# Altium PCB ECEN5730_brd1a_2022-15-01.PcbDoc
Units mil, origin at the board's own origin, x right, y up, seen from the top; angles counter-clockwise.
Board outline 3500 x 2000 mil, 2 copper layers (Top Layer, Bottom Layer), stack 61.756 mil thick; 22 components, 12 nets, 57 pads, 13 vias.
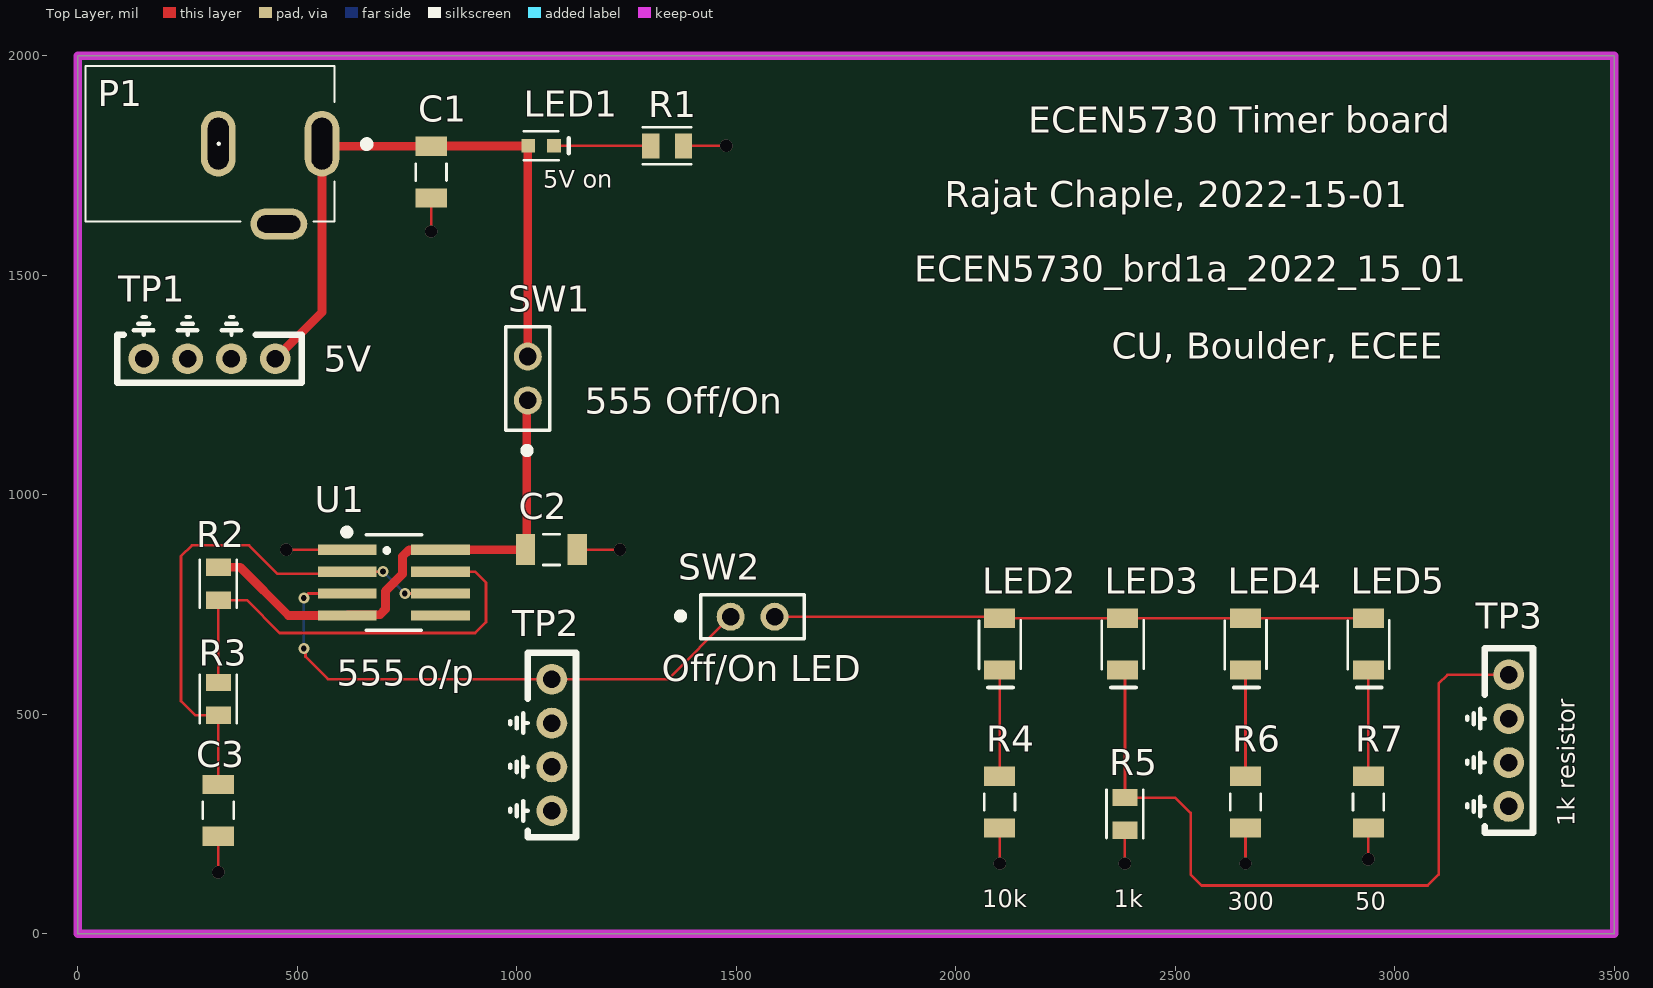
[diagram p0: Top Layer view]
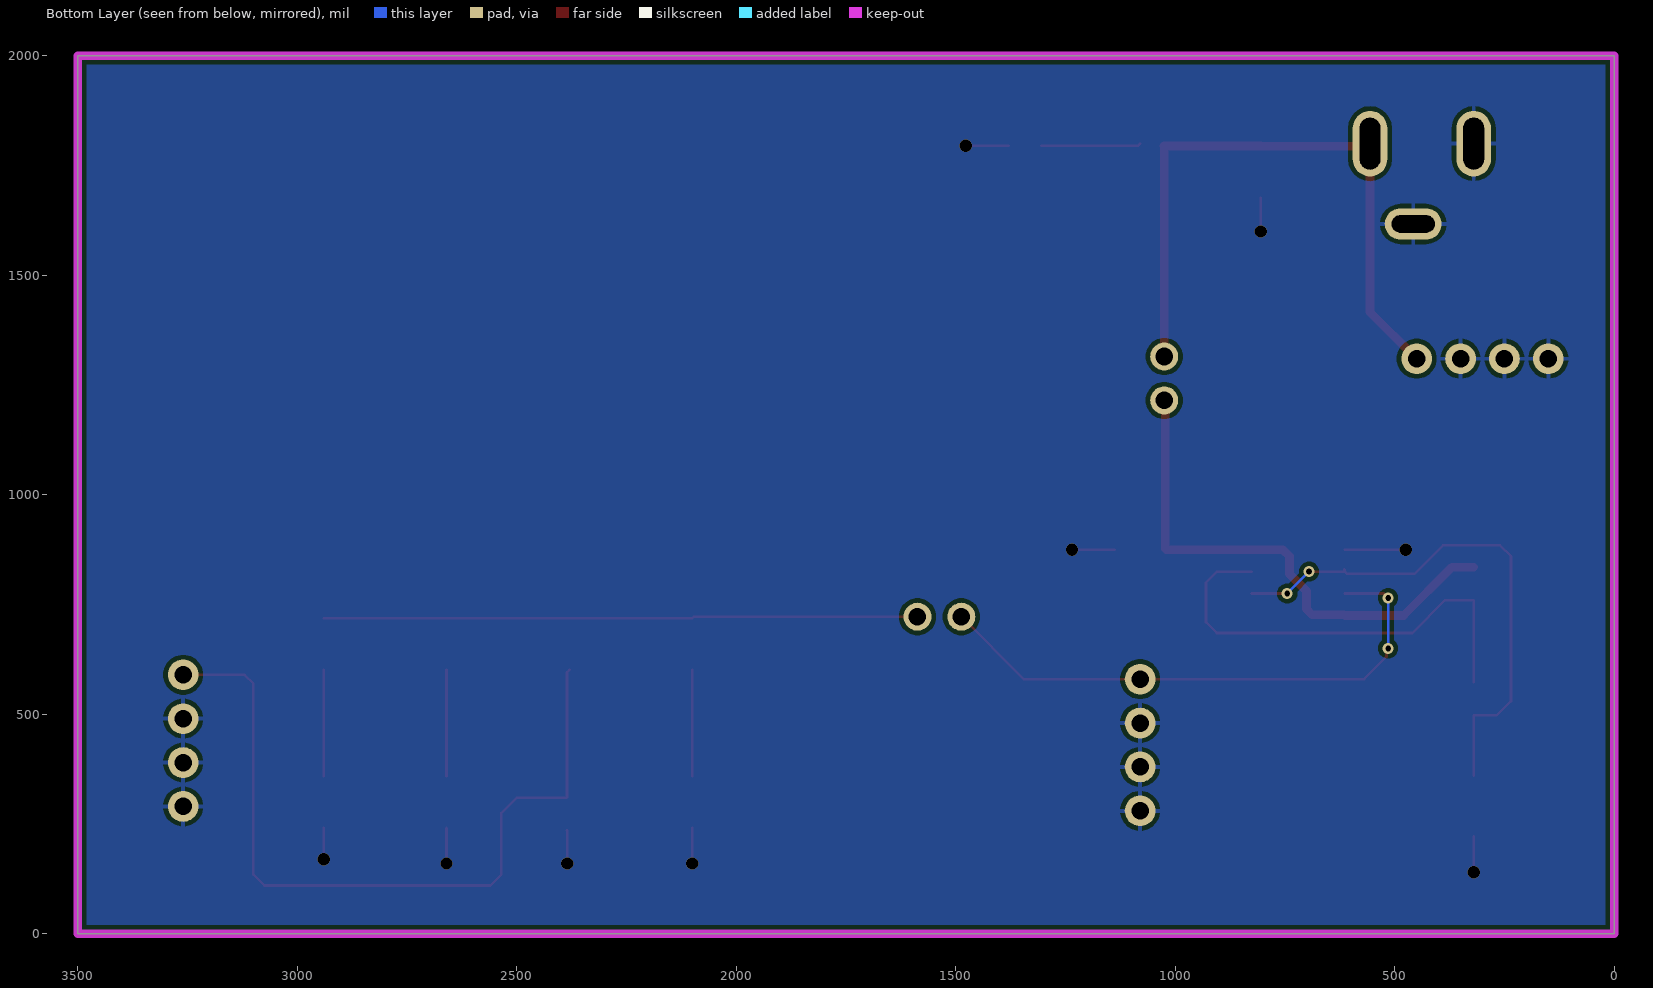
[diagram p1: Bottom Layer view, seen from below]
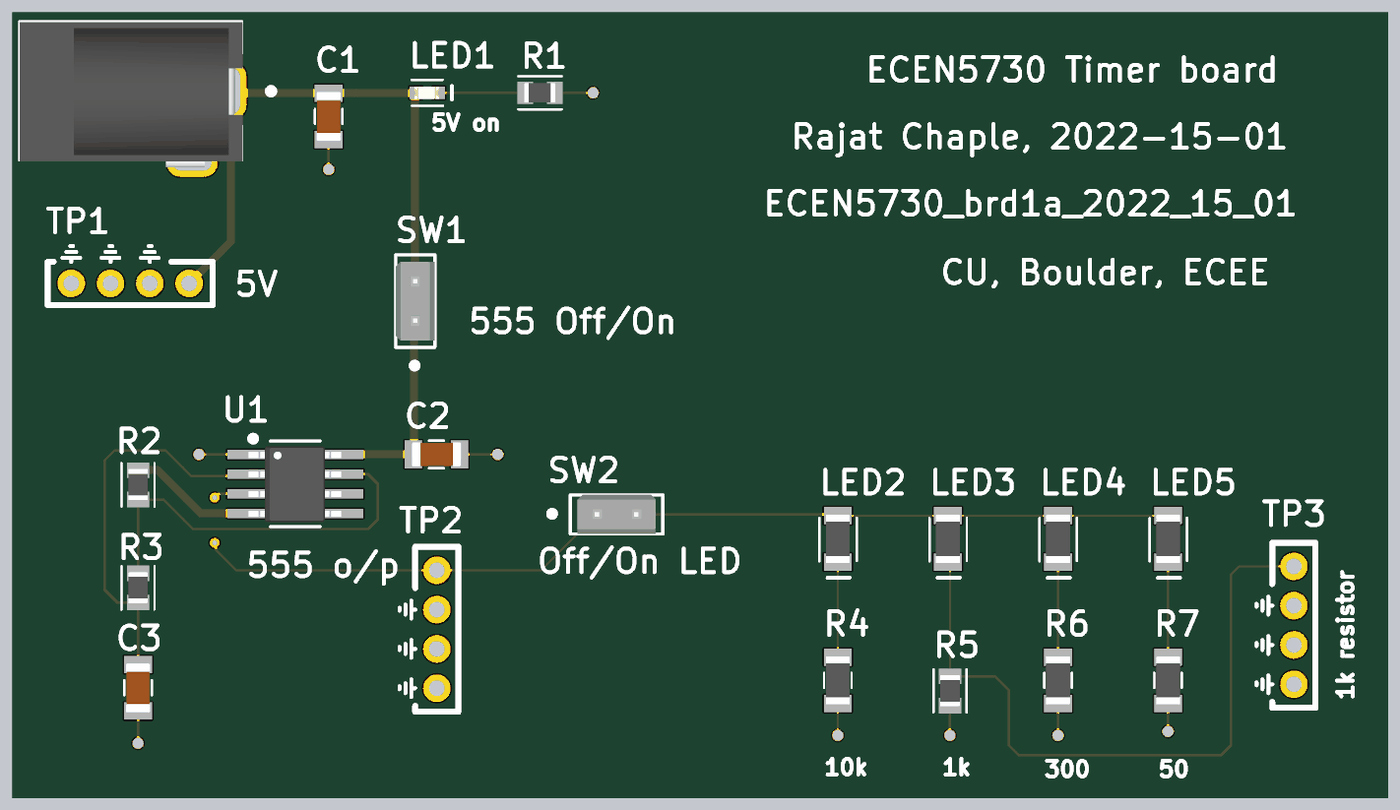
[diagram p2: 3D render of the assembled board from above, using the file's embedded part models]

## Layer stack, top to bottom
Top Solder: solder mask 1, SM-001, Dk 4
Top Layer: signal copper 1.378
Dielectric 1: core 59, Core-043, Dk 4.3
Bottom Layer: signal copper 1.378
Bottom Solder: solder mask 1, SM-001, Dk 4

## Board outline
0,0 3500,0 3500,2000 0,2000

## Design rules (kind name [scope] priority, off if disabled: settings)
BoardOutlineClearance [All] p1: gap=10 ignorepadtopadclearanceinfootprint=FALSE except(0: Arc-SplitContinuation Track-SplitContinuation SMDPad-SplitContinuation THPad-SplitContinuation Via-SplitContinuation Fill-SplitContinuation Poly-SplitContinuation Region-SplitContinuation Text-SplitContinuation)
Clearance [All] p1: gap=10 ignorepadtopadclearanceinfootprint=FALSE except(0: Arc-Hole Track-Hole SMDPad-Hole THPad-Hole Via-Hole Fill-Hole Poly-Hole Region-Hole Text-Hole)
HoleSize [All] p1: absolutevalues=TRUE maxlimit=120 minlimit=1 maxpercent=80.000 minpercent=20.000
PlaneClearance [All] p1: clearance=10
PlaneConnect [All] p1: planeconnectstyle=Direct reliefexpansion=20 reliefentries=4 reliefconductorwidth=10 reliefairgap=10
PolygonConnect [All] p1: thpad.connectstyle=Relief thpad.reliefconductorwidth=10 thpad.reliefentries=4 thpad.polygonreliefangle="90 Angle" thpad.airgapwidth=10 smdpad.connectstyle=Direct smdpad.reliefconductorwidth=10 smdpad.reliefentries=4 smdpad.polygonreliefangle="90 Angle" smdpad.airgapwidth=10 via.connectstyle=Direct via.reliefconductorwidth=10 via.reliefentries=4 via.polygonreliefangle="90 Angle" via.airgapwidth=10
RoutingVias [All] p1: holewidth=13 width=80 viastyle="Through Hole" minholewidth=13 minwidth=25 maxholewidth=60 maxwidth=25
SolderMaskExpansion [All] p1: expansion=4 istentingtop=FALSE
UnRoutedNet [All] p1: checkbadconnections=TRUE
Width "Schematic Width Constraint_1" [InNet('555_5v')] p1: maxlimit=100 minlimit=10 preferedwidth=20 minimp=50.000000 maximp=50.000000 favimp=50.000000
Width "Schematic Width Constraint" [InNet('+5v')] p2: maxlimit=100 minlimit=10 preferedwidth=20 minimp=50.000000 maximp=50.000000 favimp=50.000000
Width [All] p3: maxlimit=100 minlimit=6 preferedwidth=6 minimp=50.000000 maximp=50.000000 favimp=50.000000
26 further rules are at their usual default settings.

## Components (designator, comment, footprint, x,y, rotation, side; value= is the part's Value field where it differs from the comment)
C1 "22uF" 1206_Passive_Capacitor 805,1735 r90 top
C2 "22uF" 1206_Passive_Capacitor 1079,875 r180 top
C3 "1uF" 1206_Passive_Capacitor 320,281 r90 top
LED1 "KT-0603R" LED_0603 1055.53,1795 r0 top value=Green
LED2 "Red" LED_1206 2100,660 r270 top
LED3 "Red" LED_1206 2380,660 r270 top
LED4 "Red" LED_1206 2660,660 r270 top
LED5 "Red" LED_1206 2940,660 r270 top
P1 "Power Jack" Power_Jack 556.22,1800 r180 top value="CONN PWR JACK 2X5.5MM SOLDER"
R1 "1k" 0805_Passive_Resistor 1342.4,1795 r180 top value="1K Ohm"
R2 "1k" 0805_Passive_Resistor 320,797.4 r90 top value="1K Ohm"
R3 "1k" 0805_Passive_Resistor 320,535.2 r90 top value="1K Ohm"
R4 "10k" 1206_Passive_Resitor 2100,300 r90 top value=10KOhm
R5 "1k" 0805_Passive_Resistor 2385.5,273 r90 top value="1K Ohm"
R6 "300" 1206_Passive_Resitor 2660,300 r90 top value=300Ohm
R7 "47 Ohms" 1206_Passive_Resitor 2940,300 r90 top value=47Ohm
SW1 "SW_555off/on" 2Pin-Header-Conn 1025,1215 r90 top
SW2 "SW_LED_off/on" 2Pin-Header-Conn 1487.26,722.17 r0 top
TP1 "TP_5V" TP10x_Probe 300,1310 r180 top
TP2 "TP_555_Output" TP10x_Probe 1080,430 r270 top
TP3 "TP_LED_current" TP10x_Probe 3260,440 r270 top
U1 "NE555DR" TS555IDTTR 720,800 r0 top

## Footprints (in the part's own frame and the unit in brackets; to place one, negate y for a bottom-side part, rotate by r counter-clockwise, add the part's x,y. Pads: shape width x height; smd on the part's side, far side on the other; paste and mask are expansions set on the pad)
2Pin-Header-Conn [mm]
  round 1.62 hole 1.02: 1(0,0) 2(2.54,0)
  silkscreen extent -3.03,-1.27 4.26,1.26, body extent -1.27,-1.27 3.81,1.27, height 8.13
0805_Passive_Resistor [mm] "Reference: http://livepartlibrary.com/fpdimensions.html"
  rect 1x1.45 smd mask+0: 1(-0.95,0) 2(0.95,0)
  silkscreen extent -1.4,-1.07 1.4,1.07, body extent -0.98,-0.62 1.02,0.63, height 0.5
1206_Passive_Capacitor [mil]
  rect 44x71 smd: 1(-59,0) 2(59,0)
  silkscreen extent -19,-35 19,35, body extent -63,-31 63,32, height 50
1206_Passive_Resitor [mil]
  rect 44x71 smd: 1(-59,0) 2(59,0)
  silkscreen extent -19,-35 19,35, body extent -61,-31 61,31, height 26
LED_0603 [mm]
  rect 0.8x0.8 smd: 1(-0.75,0) 2(0.75,0)
  silkscreen extent -1.02,-0.84 1.6,0.84, body extent -0.84,-0.41 0.76,0.39, height 0.55
LED_1206 [mil]
  rect 44x71 smd: 1(-59,0) 2(59,0)
  silkscreen extent -54,-47 99,48, body extent -61,-31 61,31, height 26
Power_Jack [mm]
  oval 2x3.8 hole 1.2 slot 3 at 90 deg: 1(0,0) 2(6,0)
  oval 3.3x1.8 hole 1 slot 2.5 at 0 deg: 3(2.5,4.65)
  silkscreen extent -2.79,-4.5 13.68,4.5, body extent -0.76,-4.45 13.64,4.95, height 11.49
TP10x_Probe [mil] "Small Probs footprint"
  round 70 hole 40: 1(-150,0) 2(-50,0) 2(50,0) 2(150,0)
  silkscreen extent -210,-95 210,55
TS555IDTTR [mm] "IC OSC Single Timer 2.7MHz 8SOIC"
  rect 3.4x0.6 smd: 1(-2.7,1.905) 2(-2.7,0.635) 3(-2.7,-0.635) 4(-2.7,-1.905) 5(2.7,-1.905) 6(2.7,-0.635) 7(2.7,0.635) 8(2.7,1.905)
  silkscreen extent -2.85,-2.77 1.6,3.05, body extent -3.03,-2.48 2.96,2.43, height 1.75

## Part data
C1 C2: library part C_22uF_1206, "22uF ±10% 25V X5R 1206 Multilayer Ceramic Capacitors MLCC - SMD/SMT RoHS", LCSC Part#=C12891, MFR Part #=CL31A226KAHNNNE, Datasheet=https://datasheet.lcsc.com/lcsc/1811031514_Samsung-Electro-Mechanics-CL31A226KAHNNNE_C12891.pdf, Type=Extended
C3: library part C_1uF_1206, "MULTILAYER CERAMIC CAPACITORS MLCC - SMD/SMT 1UF 50V 1206 ROHS", LCSC Part#=C1848, MFR Part #=CL31B105KBHNNNE, Digikey Link=https://www.digikey.com/product-detail/en/C1206C105M4RACTU/399-8150-1-ND/3471873/?itemSeq=304982366, Digikey Part=399-8150-1-ND, Type=Basic
LED1: library part LED_GREEN_0603, "LIGHT EMITTING DIODES (LED) GREEN 520~535NM 112~258MCD@20MA TOP VIEW 0603 ROHS", LCSC Part#=C72043, MFR Part #=19-217/GHC-YR1S2/3T, Type=Basic
LED2 LED3 LED4 LED5: library part LED_RED_1206, "Red 621~631nm 1206 Light Emitting Diodes (LED) RoHS", LCSC Part#=C93133, MFR Part #=15-21/R6C-FQ1R1B/2T, Datasheet=https://datasheet.lcsc.com/szlcsc/1811151241_Everlight-Elec-15-21-R6C-FQ1R1B-2T_C93133.pdf, Type=Extended
P1: library part "P_Power Jack", "Power Barrel Connector Jack 2.10mm ID (0.083\"), 5.50mm OD (0.217\") Through Hole, Right Angle", LCSC Part#=C136744, Digikey Link=https://www.digikey.com/product-detail/en/PJ-102A/CP-102A-ND/275425/?itemSeq=304982367, Digikey Part=CP-102A-ND, Type=Extended
R1 R2 R3 R5: library part R_1K_0805, "CHIP RESISTOR - SURFACE MOUNT 1KOHMS ±1% 1/8W 0805 ROHS", LCSC Part#=C17513, MFR Part #=0805W8F1001T5E, Type=Basic
R4: library part R_10KOhm_1206, "10 kOhms ±5% 0.25W, 1/4W Chip Resistor 1206 (3216 Metric) Automotive AEC-Q200 Thick Film", LCSC Part#=C17902, Digikey Link=https://www.digikey.com/product-detail/en/RMCF1206JT300R/RMCF1206JT300RCT-ND/1942776/?itemSeq=304982374, Digikey Part=RMCF1206JT300RCT-ND, Type=Basic
R6: library part R_300Ohm_1206, "CHIP RESISTOR - SURFACE MOUNT 300OHMS ±1% 1/4W 1206 ROHS", LCSC Part#=C17887, MFR Part #=1206W4F3000T5E, Datasheet=https://datasheet.lcsc.com/szlcsc/Uniroyal-Elec-1206W4F3000T5E_C17887.pdf, Type=Basic
R7: library part R_47Ohm_1206, "47Ω ±5% 0.25W ±200ppm/℃ 1206 Chip Resistor - Surface Mount RoHS", LCSC Part#=C25384, MFR Part #=1206W4J0470T5E, Datasheet=https://datasheet.lcsc.com/lcsc/1811101020_UNI-ROYAL-Uniroyal-Elec-1206W4J0470T5E_C25384.pdf, Type=Extended
SW1 SW2: library part SW_2Pin_100mil_Switch, "2Pin Header", LCSC Part#=C124375, Type=Extended
TP1 TP2 TP3: library part TP_10x_Probe, "Test Point 300 mil centers"
U1: library part U_555_Slow, "555 Timer SOIC-8_150MIL ROHS 150ns Rise Time", LCSC Part#=C7593, Digikey Link=https://www.digikey.com/product-detail/en/texas-instruments/NE555DR/296-6501-1-ND/372490, MFR Part #=NE555DR, Type=Basic

## Via types
v1: diameter 28, hole 28, Top Layer to Bottom Layer, 9 vias
v2: diameter 25, hole 13, Top Layer to Bottom Layer, 4 vias

## Nets (pads, with @x,y where several pads share a name; then routed paths per layer and width w, separated by ;. In a path a pad name is that pad's centre, name@x,y a point inside that pad or via, vN(x,y) a via of type N, cw(c..) or ccw(c..) an arc to the next point about the centre after c; other vN are vias at no path point)
555_5v: C2.2 R2.2 SW1.1 U1.4 U1.8 | length 1197.4
  Top Layer w20: R2.2 370.2,834.8 480,725 U1.4 615.51,726.81 688.28,726.81 700.63,739.16 700.63,780 739.37,818.74 739.37,859.37 755,875 U1.8 C2.2 1022.5,877.5 1022.5,1212.5 SW1.1
555_Output: SW2.1 TP2.1 U1.3 | length 1286.8
  Top Layer w6: v2(515,650) 518.64,646.36 518.64,631.36 570,580 TP2.1 1345.09,580 SW2.1 ; v2(515,765) 525,775 U1.3
  Bottom Layer w6: v2(515,650) v2(515,765)
+5v: C1.2 LED1.1 P1.1 SW1.2 TP1.1 | length 1489.9
  Top Layer w20: TP1.1 556.22,1416.22 P1.1 562.22,1794 C1.2 805.5,1794.5 LED1.1@1025.5,1794.5 ; SW1.2@1022.5,1312.5 SW1.2 1025,1794 LED1.1@1025.5,1794.5 ; LED1.1 LED1.1@1025.5,1794.5
GND: C1.1 C2.1 C3.1 P1.2 P1.3 R1.1 R4.1 R5.1 R6.1 R7.1 TP1.2 TP2.2 TP3.2 U1.1 | length 807.2
  Top Layer w6: v1(320,140) C3.1 ; v1(475,875) U1.1 ; v1(805,1600) C1.1 ; C2.1 v1(1235,875) ; R1.1 v1(1477.4,1795) ; v1(2100,160) R4.1 ; v1(2385,160) 2385,235.1 R5.1 ; v1(2660,160) R6.1 ; v1(2940,170) 2935,170 2940,175 R7.1
NetC3_2: C3.2 R3.1 U1.2 U1.6 | length 1219.3
  Top Layer w6: C3.2@320,360 R3.1 267.2,497.8 235,530 235,860 260,885 390,885 455,820 608.7,820 U1.2 v2(695,825) ; U1.2@613.7,828.7 U1.2@615,830 ; v2(745,775) U1.6
  Bottom Layer w6: v2(695,825) v2(745,775)
NetLED1_2: LED1.2 R1.2 | length 227.1
  Top Layer w6: LED1.2@1080,1800 1085,1795 LED1.2 R1.2
NetLED2_1: LED2.1 LED3.1 LED4.1 LED5.1 SW2.2 | length 1359
  Top Layer w6: SW2.2@1587.26,727.17 SW2.2 2096.83,722.17 LED2.1 LED3.1 LED4.1 LED5.1
NetLED2_2: LED2.2 R4.2 | length 242
  Top Layer w6: R4.2 LED2.2
NetLED3_2: LED3.2 R5.2 TP3.1 | length 1791
  Top Layer w6: LED3.2 2385.5,595.5 R5.2 2385.9,310 2500,310 2535,275 2535,135 2560,110 3075,110 3100,135 3100,570 3120,590 TP3.1 TP3.1@3265,590
NetLED4_2: LED4.2 R6.2 | length 242
  Top Layer w6: R6.2 LED4.2
NetLED5_2: LED5.2 R7.2 | length 242
  Top Layer w6: R7.2 LED5.2
NetR2_1: R2.1 R3.2 U1.7 | length 1042.9
  Top Layer w6: R3.2 R2.1 385,760 460,685 905,685 930,710 930,800 905,825 U1.7
pads on no net: U1.5

## Polygon pours and split planes (outlines as drawn)
GND on Bottom Layer "GND_L02_P000" (solid, pour order 0): 0,2000 3500,2000 3500,0 0,0

## Keep-outs
Keep-Out Layer:
  the board outline again, w20

## Silkscreen, mask and mechanical layers (free items; w line width, h text height)
Top Overlay:
  text "ECEN5730 Timer board" at 2165,1825 h60
  text "5V on" at 1060,1700 h40
  text "Rajat Chaple, 2022-15-01" at 1975,1654.99 h60
  text "ECEN5730_brd1a_2022_15_01" at 1905,1485 h60
  text "CU, Boulder, ECEE" at 2355,1309.99 h60
  text "5V" at 560,1280 h60
  text "555 Off/On" at 1155,1185 h60
  text "Off/On LED" at 1330,575 h60
  text "555 o/p" at 590,564.99 h60
  text "1k resistor" at 3410,245 h40 r90
  text "10k" at 2060,60 h40
  text "1k" at 2360,60 h40
  text "300" at 2620,55 h40
  text "50" at 2910,55 h40